# EAGLE board Bottom Panel V5 - New Holes (EAGLE 7.4.0)
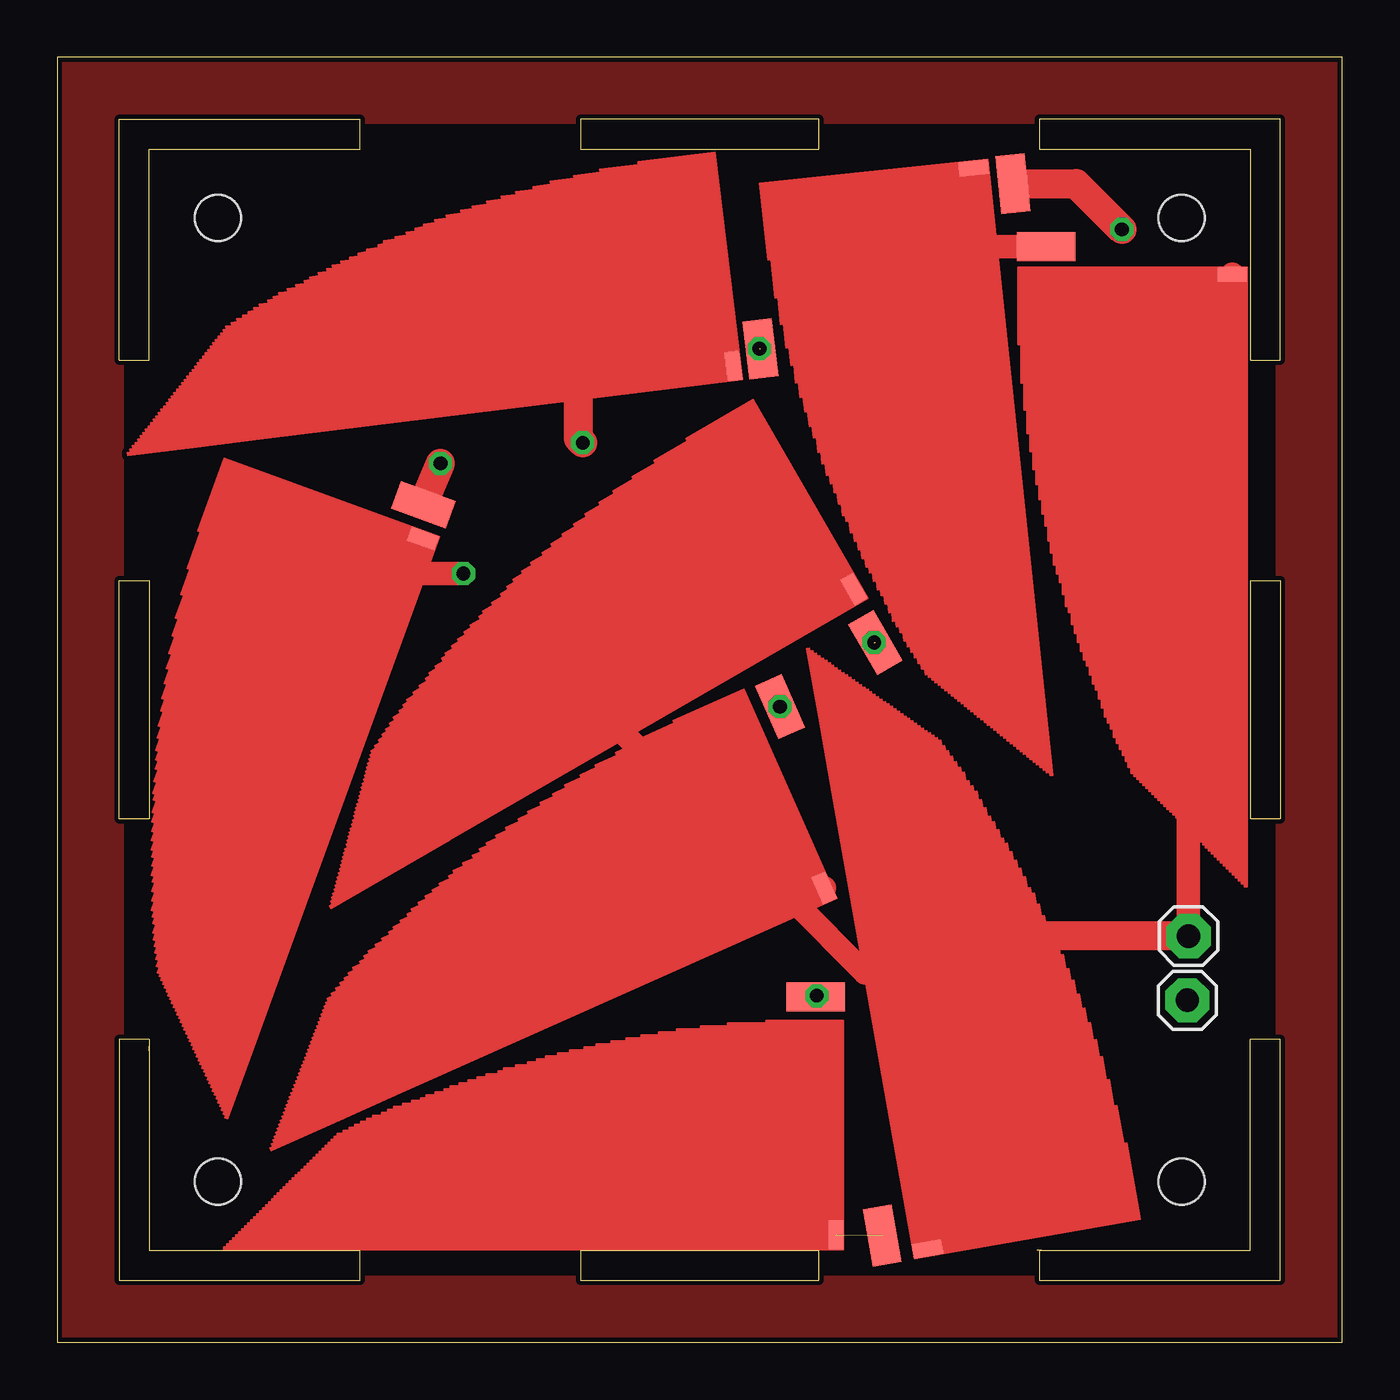
[diagram p0: board, top side]
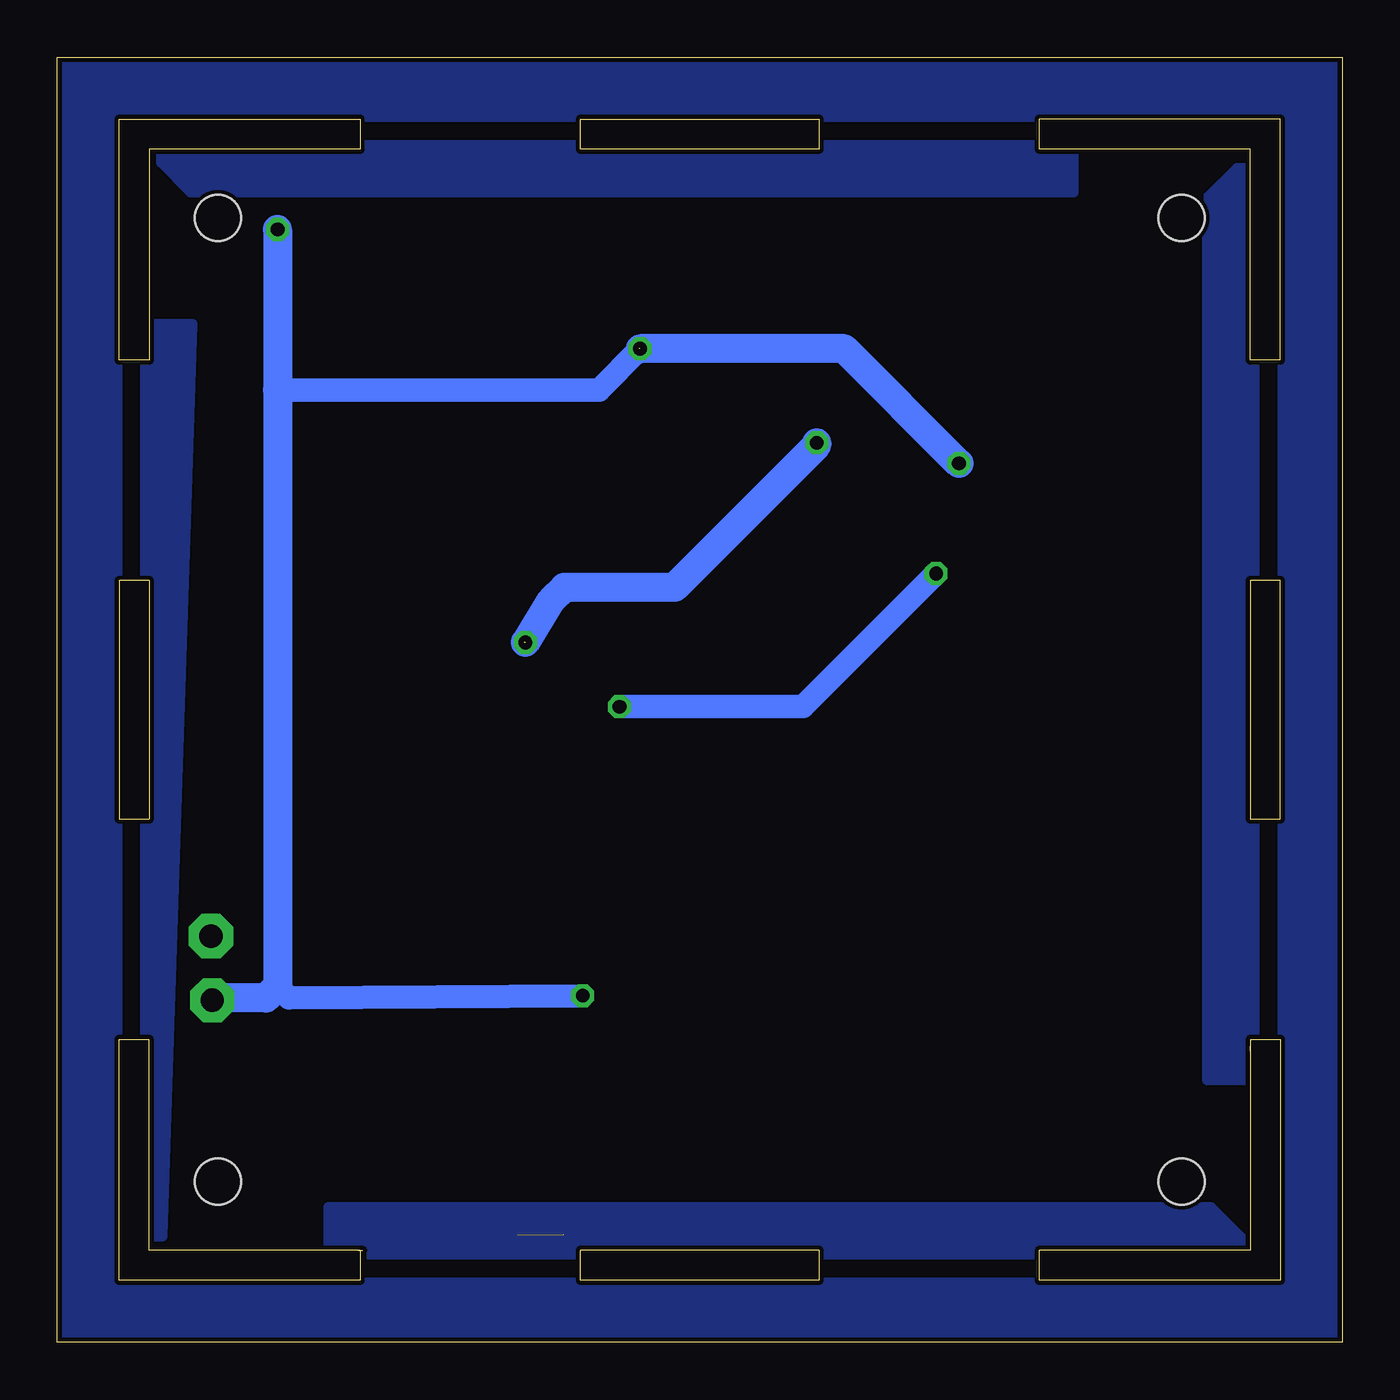
[diagram p1: board, bottom side, seen from below]

Size 56 x 56 mm. Coordinates in mm from the lower left corner, seen from the top.
Outline: 23,53.3 22.8,53.3 22.8,52 33.2,52 33.2,53.3 22.9,53.3
Outline: 42.9,4 42.7,4
Outline: 4,12.7 4,12.9
Outline: 52,43.1 52,42.9
Outline: 4,42.8 4,52 13.2,52 13.2,53.3 2.7,53.3 2.7,42.8 4,42.8
Outline: 42.8,52 52,52 52,42.8 53.3,42.8 53.3,53.3 42.8,53.3 42.8,52
Outline: 4,33.2 4,22.8 2.7,22.8 2.7,33.2 4,33.2
Outline: 4,13.2 4,4 13.2,4 13.2,2.7 2.7,2.7 2.7,13.2 4,13.2
Outline: 22.8,4 33.2,4 33.2,2.7 22.8,2.7 22.8,4
Outline: 42.8,4 52,4 52,13.2 53.3,13.2 53.3,2.7 42.8,2.7 42.8,4
Outline: 52,33.2 52,22.8 53.3,22.8 53.3,33.2 52,33.2
Outline: 0,0 56,0 56,56 0,56 0,0
Copper layers (1*16): Top 0.035mm / dielectric 1.5mm / Bottom 0.035mm
Design rules "default *": minimum track width 10mil, minimum drill 24mil, track to track 8mil, track to pad 8mil, pad to pad 8mil, via to via 8mil, smd to smd 8mil, copper to edge 8mil, drill to drill 8mil, minimum pad ring 10mil, minimum via ring 8mil, stop-mask expansion 4mil, vias tented up to drill 0mil, thermal gap 10mil
Holes 2 mm at 7,7 49,7 7,49 49,49

## Footprints (pad centres in the part's own frame; a part is rotated, then mirrored left to right if it is on the bottom)
TRISOLX = smd 1.27 x 0.635: P$1 0.584,0.26
SMD1,27-2,54 = smd 1.27 x 2.54: 1 0,0
1X01 = drill 1.016 pad 1.93 octagon: 1 0,0

## Placement (x,y rotation side)
E$1  [TRISOLX]  40.5,51.5 186 top
E$2  [TRISOLX]  34.2,4.1 90 top
E$3  [TRISOLX]  51.8,46.8 180 top
E$4  [TRISOLX]  37.4,3.7 10 top
E$5  [TRISOLX]  35.24,32.44 120 top
E$6  [TRISOLX]  29.8,42 97 top
E$7  [TRISOLX]  16.58,35.07 160 top
E$8  [SMD1,27-2,54]  15.95,36.5 70 top
E$9  [SMD1,27-2,54]  35.95,4.65 10 top
E$10  [SMD1,27-2,54]  31.5,27.7 24 top
E$11  [SMD1,27-2,54]  41.65,50.5 186 top
E$12  [SMD1,27-2,54]  35.65,30.5 30 top
E$13  [SMD1,27-2,54]  33.05,15.05 90 top
E$14  [SMD1,27-2,54]  30.65,43.3 187 top
E$15  [SMD1,27-2,54]  43.1,47.75 270 top
E$16  [1X01]  49.3,17.7 0 top
E$17  [1X01]  49.25,14.9 0 top
E$19  [TRISOLX]  33.9,19.37 114 top

## Library data of the parts
E$1-E$7 E$19 = trisolx
E$8-E$15 = wirepad
E$16 E$17 = adafruit

## Nets
S$1: E$3.P$1 E$4.P$1 E$5.P$1 E$16.1 E$19.P$1
S$3: E$1.P$1 E$15.1
S$4: E$8.1 E$11.1 E$13.1 E$14.1 E$17.1
S$5: E$2.P$1 E$9.1
S$8: E$7.P$1 E$10.1
S$10: E$6.P$1 E$12.1

## Tracks (layer width: path | path; a pad name or v marks a point on that pad's centre or on a via)
S$1
  Top 0.254: 37.9,6.6 37.9,4.09 E$4.P$1 | 32.1,19.2 32.83,19.2 E$19.P$1 | 32.1,32.6 34.5,32.6 E$5.P$1
  Top 1.016: E$16.1 49.3,44.62 E$3.P$1 | 40.7,16.1 35.2,16.1 32.1,19.2 | E$19.P$1 31.4,19.8 24.2,27 24.2,29.3 25.7,30.8 30.3,30.8 32.1,32.6
  Top 1.27: E$16.1 42.3,17.7 40.7,16.1 40.7,9.4 37.9,6.6
S$2
  pour Bottom: 50.1,44.4 51.4,4.6 52.2,4.6 52.2,44.4
S$3
  Top 0.305: 39.1,49.7 39.1,50.34 E$1.P$1
  Top 1.016: E$15.1 40.25,47.75 40,48 40,48.8 39.1,49.7
S$4  (via drill 0.6)  (1 unrouted)
  Top 1.016: v33.1,15.1 33.15,15.05 E$13.1
  Top 1.27: E$11.1 44.4,50.5 v46.4,48.5 | E$8.1 v16.7,38.3
  Bottom 1.016: 46.4,15.5 45.9,15 v33.1,15.1 | 46.4,41.5 32.4,41.5 v30.6,43.3
  Bottom 1.27: v46.4,48.5 46.4,41.5 46.4,15.5 46.9,15 49.15,15 E$17.1 | v16.7,38.3 21.7,43.3 v30.6,43.3
S$5  (1 unrouted)
S$6
  pour Bottom: 5.9,11.4 5.9,49.9 4.6,51.2 3.8,51.2 3.8,11.4
S$7
  pour Bottom: 11.7,50.1 50,50.1 50.2,50.1 51.5,51.4 51.5,52.2 11.8,52.2 11.7,52.2
S$8  (via drill 0.6)
  Top 0.254: E$7.P$1 14.51,33.6 13.1,33.6
  Top 1.016: 13.1,33.6 13.2,33.5 v17.7,33.5
  Bottom 1.016: v17.7,33.5 23.5,27.7 E$10.1
  other vias: 31.5,27.7
S$9
  pour Bottom: 44.2,5.9 5.7,5.9 4.4,4.6 4.4,3.8 44.2,3.8
S$10  (via drill 0.6)  (1 unrouted)
  Top 0.254: E$6.P$1 23.15,42.55 22.7,42.1
  Top 1.27: 22.7,42.1 22.7,39.4 v22.9,39.2
  Bottom 1.27: v22.9,39.2 22.9,39.1 29.1,32.9 33.9,32.9 34.5,32.3 v35.6,30.5
S$11
  pour Bottom: 0,56 0,53.3 13.2,53.3 56,53.3 56,56 0.5,56
S$12
  pour Bottom: 0,53.3 2.7,53.3 2.7,0 0,0 0,3.4
S$13
  pour Bottom: 2.7,2.7 2.7,0 56,0 56,2.7 3.1,2.7
S$14
  pour Bottom: 53.3,53.3 53.3,2.7 56,2.7 56,53.3 53.7,53.3
S$15
  pour Top: 0,56 56,56 56,0 53.3,0 53.3,3.2 53.3,53.3 0,53.3
S$16
  pour Top: 2.7,53.3 0,53.3 0,0 53.1,0 53.1,2.7 2.7,2.7

## Text on the board
Dimension: + | -